# Altium PCB PCB1.PcbDoc
Units mm, origin at the board's own origin, x right, y up, seen from the top; angles counter-clockwise.
Board outline 66.29 x 56.39 mm, 2 copper layers (Top Layer, Bottom Layer); 8 components, 6 nets, 50 pads, 0 vias.
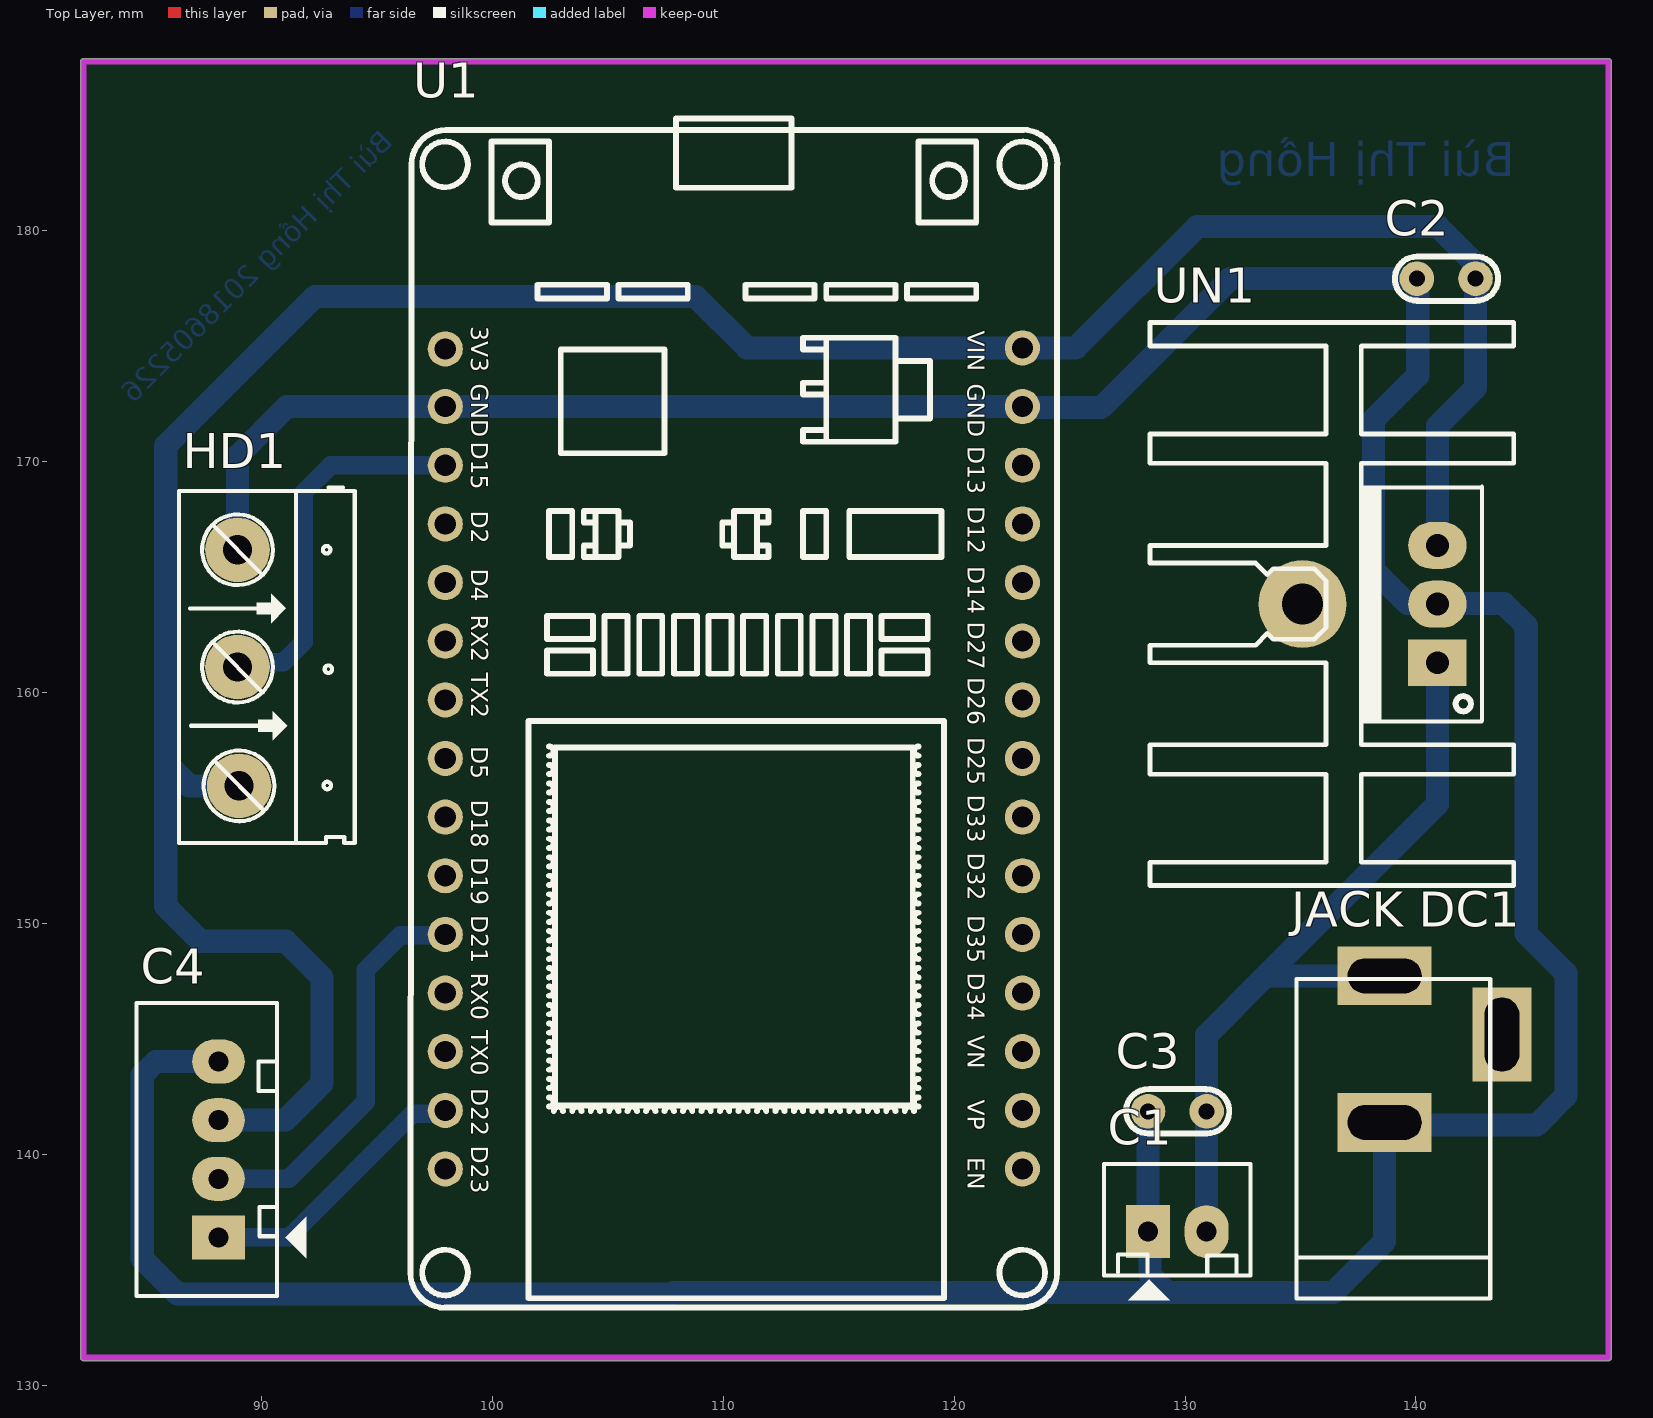
[diagram p0: Top Layer view]
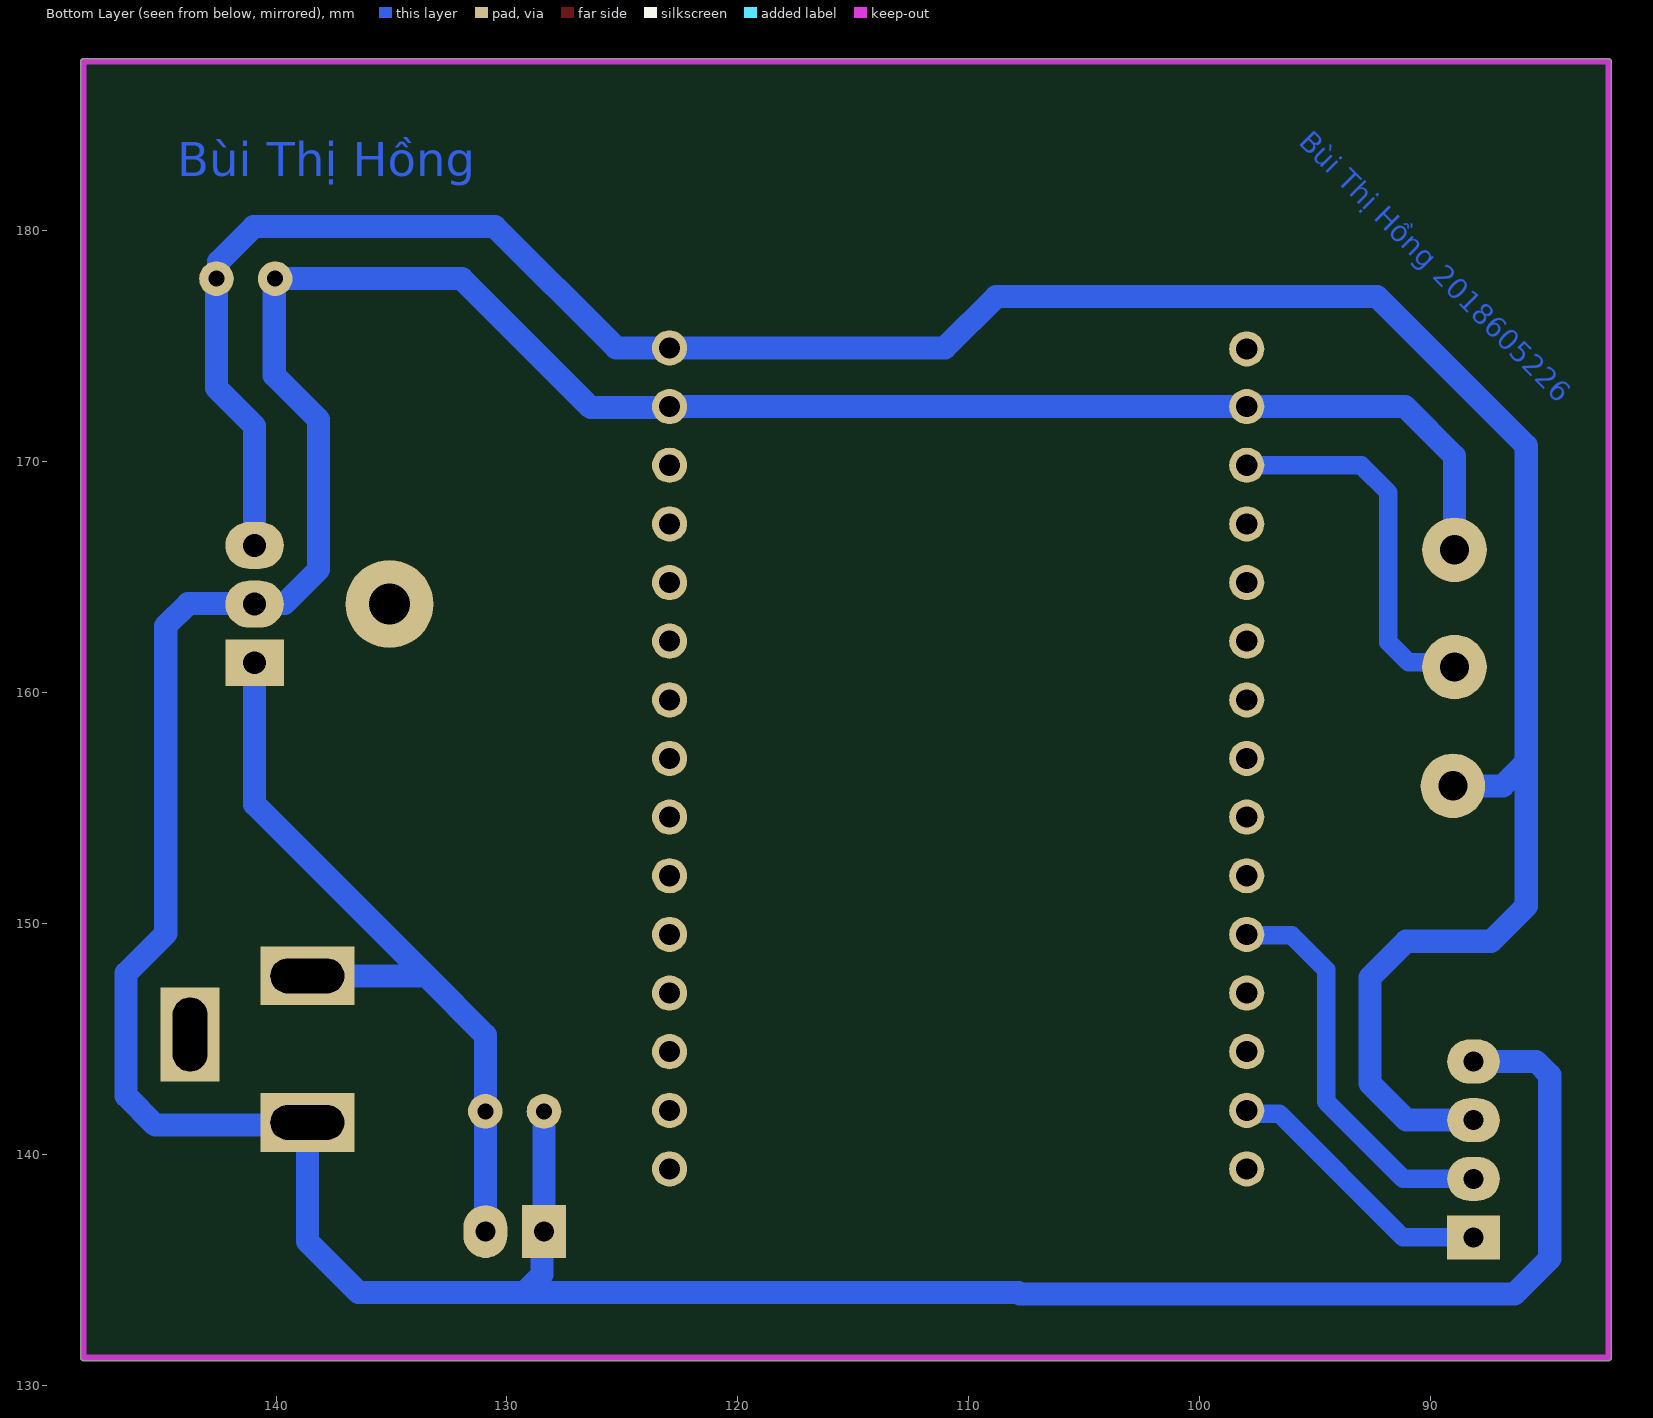
[diagram p1: Bottom Layer view, seen from below]
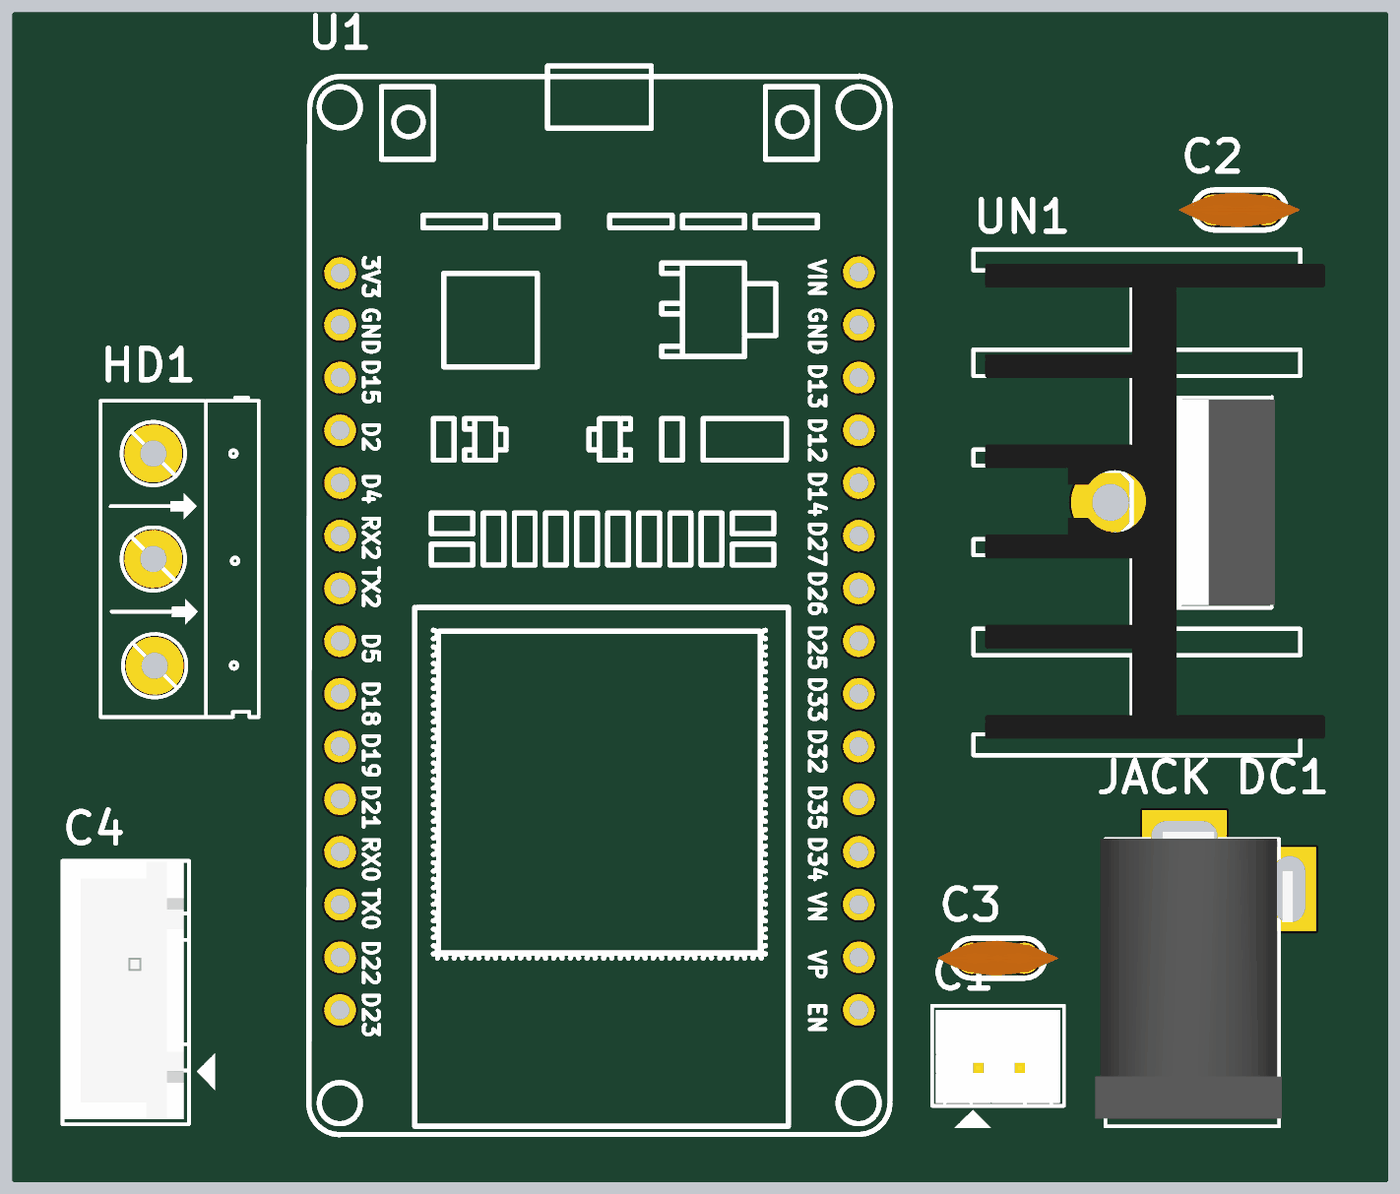
[diagram p2: 3D render of the assembled board from above, using the file's embedded part models]

## Layer stack, top to bottom
Top Solder: solder mask 0.0102, Solder Resist, Dk 3.5
Top Layer: signal copper 0.0356
Dielectric 1: dielectric 0.32, FR-4, Dk 4.8
Bottom Layer: signal copper 0.0356
Bottom Solder: solder mask 0.0102, Solder Resist, Dk 3.5

## Board outline
82.169,187.325 cw(c82.296,187.325) 82.296,187.452 148.336,187.452 cw(c148.336,187.325) 148.464,187.325 148.464,131.191 cw(c148.336,131.191) 148.336,131.063 82.296,131.063 cw(c82.296,131.191) 82.169,131.191

## Design rules (kind name [scope] priority, off if disabled: settings)
Clearance [All] p1: gap=1 ignorepadtopadclearanceinfootprint=FALSE
PolygonConnect [All] p1: connectstyle=Relief reliefconductorwidth=0.254 reliefentries=4 polygonreliefangle="90 Angle" airgapwidth=0.254
RoutingVias [All] p1: holewidth=0.711 width=1.27 viastyle="Through Hole" minholewidth=0.711 minwidth=1.27 maxholewidth=0.711 maxwidth=1.27
SolderMaskExpansion [All] p1: expansion=0.102 istentingtop=FALSE
Width VCC5 [InNet('VCC5')] p1: maxlimit=1 minlimit=1 preferedwidth=1
Width VCC_IN [InNet('VCC_IN')] p2: maxlimit=1 minlimit=1 preferedwidth=1
Width VCC33 [InNet('VCC5')] p3: maxlimit=1 minlimit=1 preferedwidth=1
Width GND [InNet('GND')] p4: maxlimit=1 minlimit=1 preferedwidth=1
Width [All] p5: maxlimit=0.8 minlimit=0.8 preferedwidth=0.8
30 further rules are at their usual default settings.

## Components (designator, comment, footprint, x,y, rotation, side; value= is the part's Value field where it differs from the comment)
C1 "Header2" Header2 128.396,136.652 r0 top
C2 "104" "tu gom" 141.313,177.927 r180 top
C3 "104" "tu gom" 129.667,141.859 r180 top
C4 "LCD_I2C" Header4 88.138,136.398 r90 top
HD1 "Header 3" HED3 88.961,166.182 r270 top
"JACK DC1" "JACK DC 5.5" "JACK DC 5.5" 141.186,144.551 r90 top value="Jac DC"
U1 "ESP32_MODULE copy" ESP32-WIFIMODULE-FOOTPRINT 108.331,158.877 r180 top
UN1 "L78M05CP" QTO-220H2 140.932,163.83 r90 top

## Footprints (in the part's own frame and the unit in brackets; to place one, negate y for a bottom-side part, rotate by r counter-clockwise, add the part's x,y. Pads: shape width x height; smd on the part's side, far side on the other; paste and mask are expansions set on the pad)
ESP32-WIFIMODULE-FOOTPRINT [mil]
  round 60 hole 36: 1(-575.9,768.25) 2(-575.9,668.25) 3(-575.9,568.25) 4(-575.9,468.25) 5(-575.9,368.25) 6(-575.9,268.25) 7(-575.9,168.25) 8(-575.9,68.25) 9(-575.9,-31.75) 10(-575.9,-131.75) 11(-575.9,-231.75) 12(-575.9,-331.75) 13(-575.9,-431.75) 14(-575.9,-531.75) 15(-575.9,-631.75) 16(408.35,-630.18) 17(408.35,-531.75) 18(408.35,-431.75) 19(408.35,-331.75) 20(408.35,-231.75) 21(408.35,-131.75) 22(408.35,-31.75) 23(408.35,68.25) 24(408.35,168.25) 25(408.35,268.25) 26(408.35,368.25) 27(408.35,468.25) 28(408.35,568.25) 29(408.35,668.25) 30(408.35,768.25)
  silkscreen extent -635,-1023 468,1005
Header2 [mil] "CON2"
  rect 75x90 hole 34: 1(0,0)
  oval 75x90 hole 34: 2(100,0)
  silkscreen extent -75,-118 175,115, body extent -68,-70 168,107, height 236
Header4 [mil] "CON4"
  rect 75x90 hole 34: 1(0,0)
  oval 75x90 hole 34: 2(100,0) 3(200,0) 4(300,0)
  silkscreen extent -100,-150 400,140, body extent -90,-90 398,136, height 276
HED3 [mil] "Header 3, 3 pin, hight 300mil, Pin to Pin 200, Colour Green"
  round 110 hole 50: 1(0,0) 2(200,0) 3(402.62,2.62)
  silkscreen extent -106,-100 500,200
"JACK DC 5.5" [mm] "Jac DC input"
  rect 2.54x4.064 hole 1.5 slot 3.2 at 90 deg: 1(3.175,2.54) 2(-3.175,2.54)
  rect 4.064x2.54 hole 1.5 slot 3.2 at 0 deg: 3(0.635,-2.54)
  silkscreen extent -10.79,-2.03 3.05,6.35, body extent -10.42,-2.67 3.4,6.84, height 11.02
QTO-220H2 [mil] "TO-220 - 1-2-3"
  round 150 hole 70: 0(0,230)
  rect 80x100 hole 39: 1(-100,0)
  oval 80x100 hole 39: 2(0,0) 3(100,0)
  silkscreen extent -480,-130 480,490, body extent -449,-177 453,469, height 1206
"tu gom" [mm] "Tu gom mini"
  round 1.5 hole 0.7: 1(-1.27,0) 2(1.27,0)
  silkscreen extent -2.25,-0.97 2.22,0.97, body extent -2.92,-0.85 2.92,0.85, height 6.12

## Part data
C1: "Header IDC, 2 x 1 Pin Vertical 2.54mm Pitch (Non-Boxed, Male)", Manufacturer="W¨¹rth Elektronik eiSos GmbH", partNo=613002143121, ComponentLink1 Description=Manufacturer, ComponentLink1URL=http://www.we-online.com, ComponentLink2 Description=Datasheet, ComponentLink2URL=http://katalog.we-online.de/em/datasheet/6130xx143121.pdf, Created by="Karrer Zheng", Created Date="29 March 2013", NoPins=02
C2 C3: library part "Tu gom 104 50V", "Cắm", Chung_Loai=Cắm, Don_Vi=Con, Ma_Hang=MH004761, So_Chan=2, Ten_Linh_Kien="Tụ gốm 104 100nF 50V"
C4: library part Header4, "Header IDC, 4 x 1 Pin Vertical 2.54mm Pitch (Non-Boxed, Male)", Manufacturer="W¨¹rth Elektronik eiSos GmbH", partNo=613002143121, ComponentLink1 Description=Manufacturer, ComponentLink1URL=http://www.we-online.com, ComponentLink2 Description=Datasheet, ComponentLink2URL=http://katalog.we-online.de/em/datasheet/6130xx143121.pdf, Created by="Karrer Zheng", Created Date="29 March 2013", NoPins=02
HD1: library part Hed3, "Header 3 (Green)"
UN1: "Positive Voltage Regulator", ComponentLink1Description="Manufacturer Link", ComponentLink1URL=http://www.st.com/, ComponentLink2Description=Datasheet, ComponentLink2URL=http://www.st.com/stonline/products/literature/ds/2146/l78m05c.pdf, DatasheetVersion=Apr-1994, LatestRevisionDate=17-Jul-2002, LatestRevisionNote="Re-released for DXP Platform.", Note="Tab is connected to pin 3 (GND).", PackageDescription="TO, Thru-Hole, Vertical, Heatsink Mounted; 3 In-Line Leads; Pitch 2.54 mm; Pin sequence 1, 3, 2", PackageReference=ISOWATT220AB, PackageVersion=Jul-1998, Published=24-Aug-2001, Publisher="Altium Limited"

## Nets (pads, with @x,y where several pads share a name; then routed paths per layer and width w, separated by ;. In a path a pad name is that pad's centre, name@x,y a point inside that pad or via, vN(x,y) a via of type N, cw(c..) or ccw(c..) an arc to the next point about the centre after c; other vN are vias at no path point)
DATA_SS: HD1.2 U1.18 | length 16.4
  Bottom Layer w0.8: HD1.2 89.166,161.307 90.949,161.307 91.821,162.179 91.821,168.656 93.008,169.843 U1.18
GND: "JACK DC1.2" C1.1 C2.2 C3.2 C4.4 HD1.1 U1.14 U1.17 UN1.2 | length 189.1
  Bottom Layer w1: C4.4 85.422,144.018 84.836,143.432 84.836,135.483 86.374,133.945 107.786,133.945 107.85,134.009 129.262,134.009 ; HD1.1 88.961,170.24 91.104,172.383 U1.17 U1.14 123.004,172.339 126.365,172.339 131.953,177.927 C2.2 140.081,177.889 140.081,173.736 138.162,171.817 138.162,165.327 139.636,163.854 140.908,163.854 UN1.2 140.956,163.854 143.814,163.854 144.78,162.887 144.78,149.555 146.496,147.839 146.496,142.533 145.227,141.264 138.758,141.264 138.646,141.376 138.646,136.233 136.422,134.009 129.262,134.009 ; C1.1 128.483,136.564 128.483,134.788 129.262,134.009 ; C1.1@128.397,136.652 C3.2
SCL: C4.1 U1.29 | length 12.1
  Bottom Layer w0.8: C4.1 91.186,136.398 96.553,141.765 97.821,141.765 U1.29
SDA: C4.2 U1.26 | length 17.6
  Bottom Layer w0.8: C4.2 91.181,138.938 94.52,142.277 94.52,147.986 96.012,149.479 97.915,149.479 U1.26
VCC5: C2.1 C4.3 HD1.3 U1.15 UN1.3 | length 117.4
  Bottom Layer w1: C4.3 91.034,141.478 92.62,143.064 92.62,147.664 91.059,149.225 87.376,149.225 85.852,150.749 85.852,156.972 ; HD1.3 86.868,155.956 85.852,156.972 ; UN1.3 140.932,171.539 142.583,173.19 C2.1 142.488,178.022 142.488,178.664 140.975,180.177 130.52,180.177 125.267,174.923 U1.15 111.031,174.923 108.809,177.145 92.31,177.145 85.852,170.688 85.852,156.972
VCC_IN: "JACK DC1.1" C1.2 C3.1 UN1.1 | length 33.9
  Bottom Layer w1: C1.2@130.937,136.652 C3.1 ; C3.1 130.937,145.161 133.503,147.726 ; 138.646,147.726 133.503,147.726 ; UN1.1 140.932,155.156 133.503,147.726
pads on no net: "JACK DC1.3" U1.1 U1.2 U1.3 U1.4 U1.5 U1.6 U1.7 U1.8 U1.9 U1.10 U1.11 U1.12 U1.13 U1.16 U1.19 U1.20 U1.21 U1.22 U1.23 U1.24 U1.25 U1.27 U1.28 U1.30 UN1.0

## Keep-outs
Keep-Out Layer:
  lines w0.254: 82.296,131.191 82.296,187.325 148.336,187.325 148.336,186.436 148.336,131.191 83.82,131.191 82.296,131.191

## Other copper
Bottom Layer:
  text "Bùi Thị Hồng 2018605226" at 95.963,183.564 h1.52 r45
  text "Bùi Thị Hồng" at 144.272,181.864 h2.52

## Text inside footprints (layer, text, board x,y; h text height)
U1: Top Overlay "VIN" at 120.584,175.663 h0.75 r270; Top Overlay "GND" at 120.584,173.363 h0.75 r270; Top Overlay "D13" at 120.584,170.663 h0.75 r270; Top Overlay "D12" at 120.584,168.063 h0.75 r270; Top Overlay "D14" at 120.584,165.463 h0.75 r270; Top Overlay "D27" at 120.584,163.063 h0.75 r270; Top Overlay "D26" at 120.584,160.663 h0.75 r270; Top Overlay "D25" at 120.584,158.063 h0.75 r270; Top Overlay "D33" at 120.584,155.563 h0.75 r270; Top Overlay "D32" at 120.584,153.063 h0.75 r270; Top Overlay "D35" at 120.584,150.363 h0.75 r270; Top Overlay "D34" at 120.584,147.863 h0.75 r270; Top Overlay "VN" at 120.584,145.163 h0.75 r270; Top Overlay "VP" at 120.584,142.363 h0.75 r270; Top Overlay "EN" at 120.584,139.863 h0.75 r270; Top Overlay "3V3" at 99.084,175.863 h0.75 r270; Top Overlay "GND" at 99.084,173.363 h0.75 r270; Top Overlay "D15" at 99.084,170.863 h0.75 r270; Top Overlay "D2" at 99.084,167.863 h0.75 r270; Top Overlay "D4" at 99.084,165.363 h0.75 r270; Top Overlay "RX2" at 99.084,163.363 h0.75 r270; Top Overlay "TX2" at 99.084,160.863 h0.75 r270; Top Overlay "D5" at 99.084,157.663 h0.75 r270; Top Overlay "D18" at 99.084,155.363 h0.75 r270; Top Overlay "D19" at 99.084,152.863 h0.75 r270; Top Overlay "D21" at 99.084,150.363 h0.75 r270; Top Overlay "RX0" at 99.084,147.863 h0.75 r270; Top Overlay "TX0" at 99.084,145.363 h0.75 r270; Top Overlay "D22" at 99.084,142.863 h0.75 r270; Top Overlay "D23" at 99.084,140.363 h0.75 r270